# Altium PCB PCB.PcbDoc
Units mm, origin at the board's own origin, x right, y up, seen from the top; angles counter-clockwise.
Board outline 56.9 x 34.04 mm, 2 copper layers (Top Layer, Bottom Layer); 29 components, 22 nets, 101 pads, 21 vias.
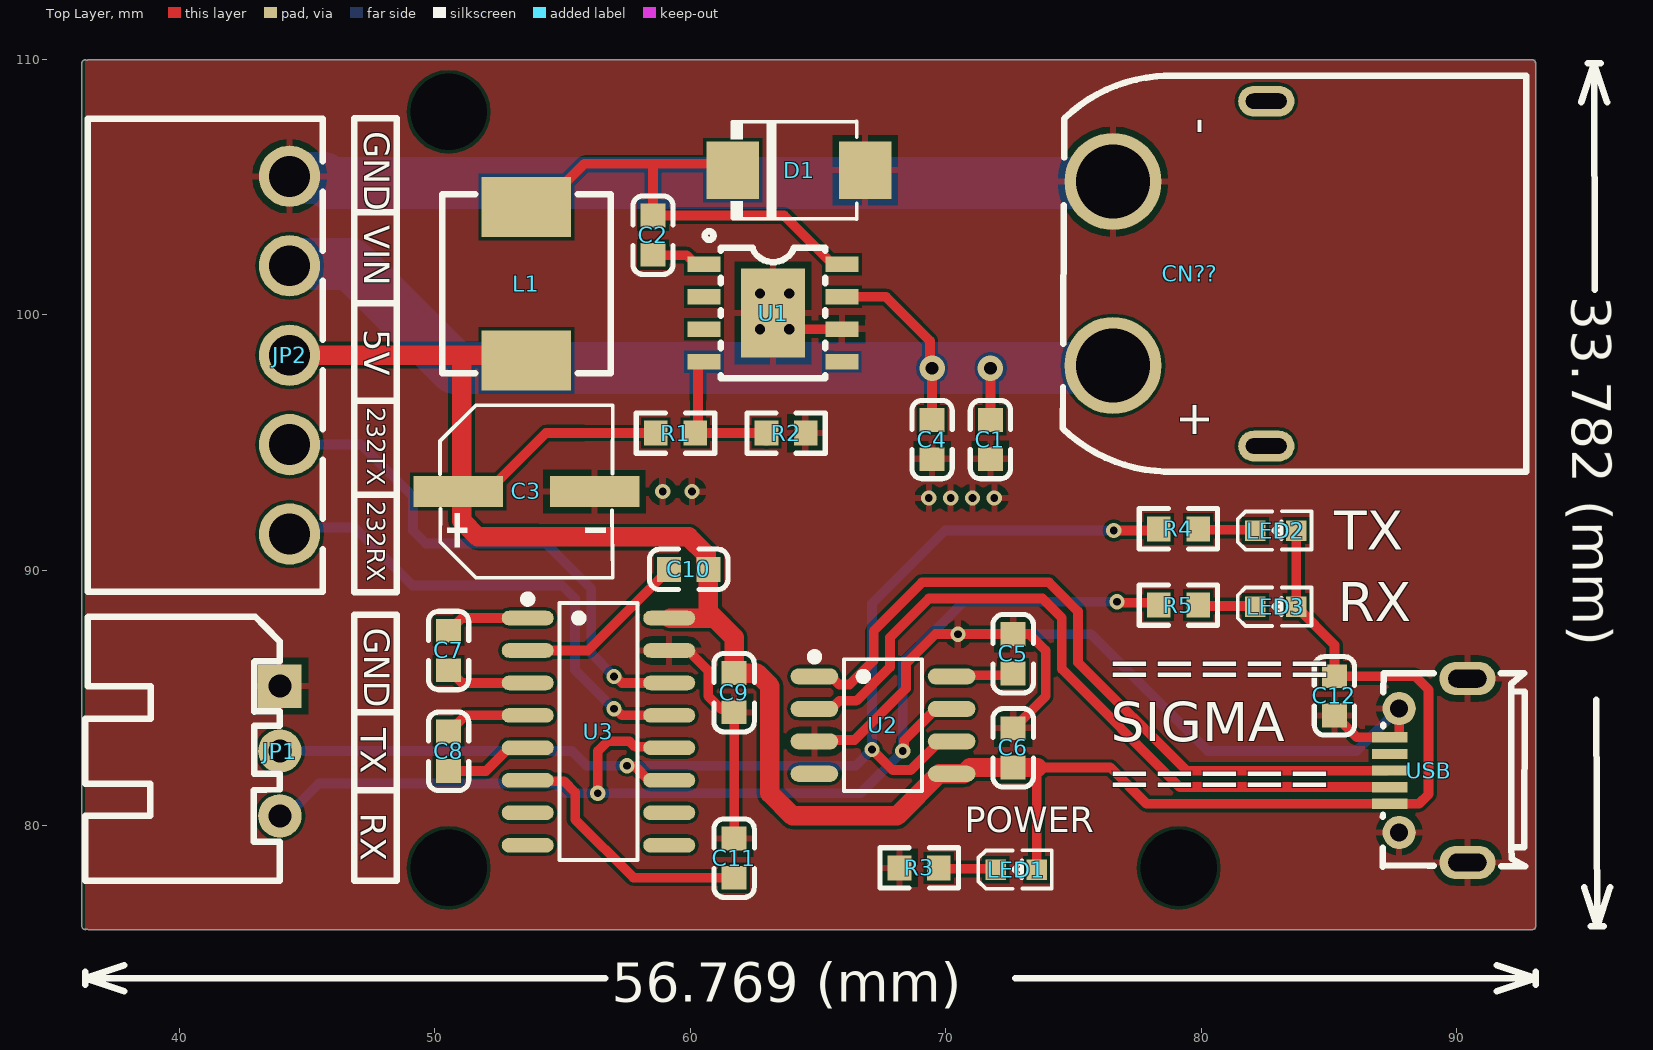
[diagram p0: Top Layer view]
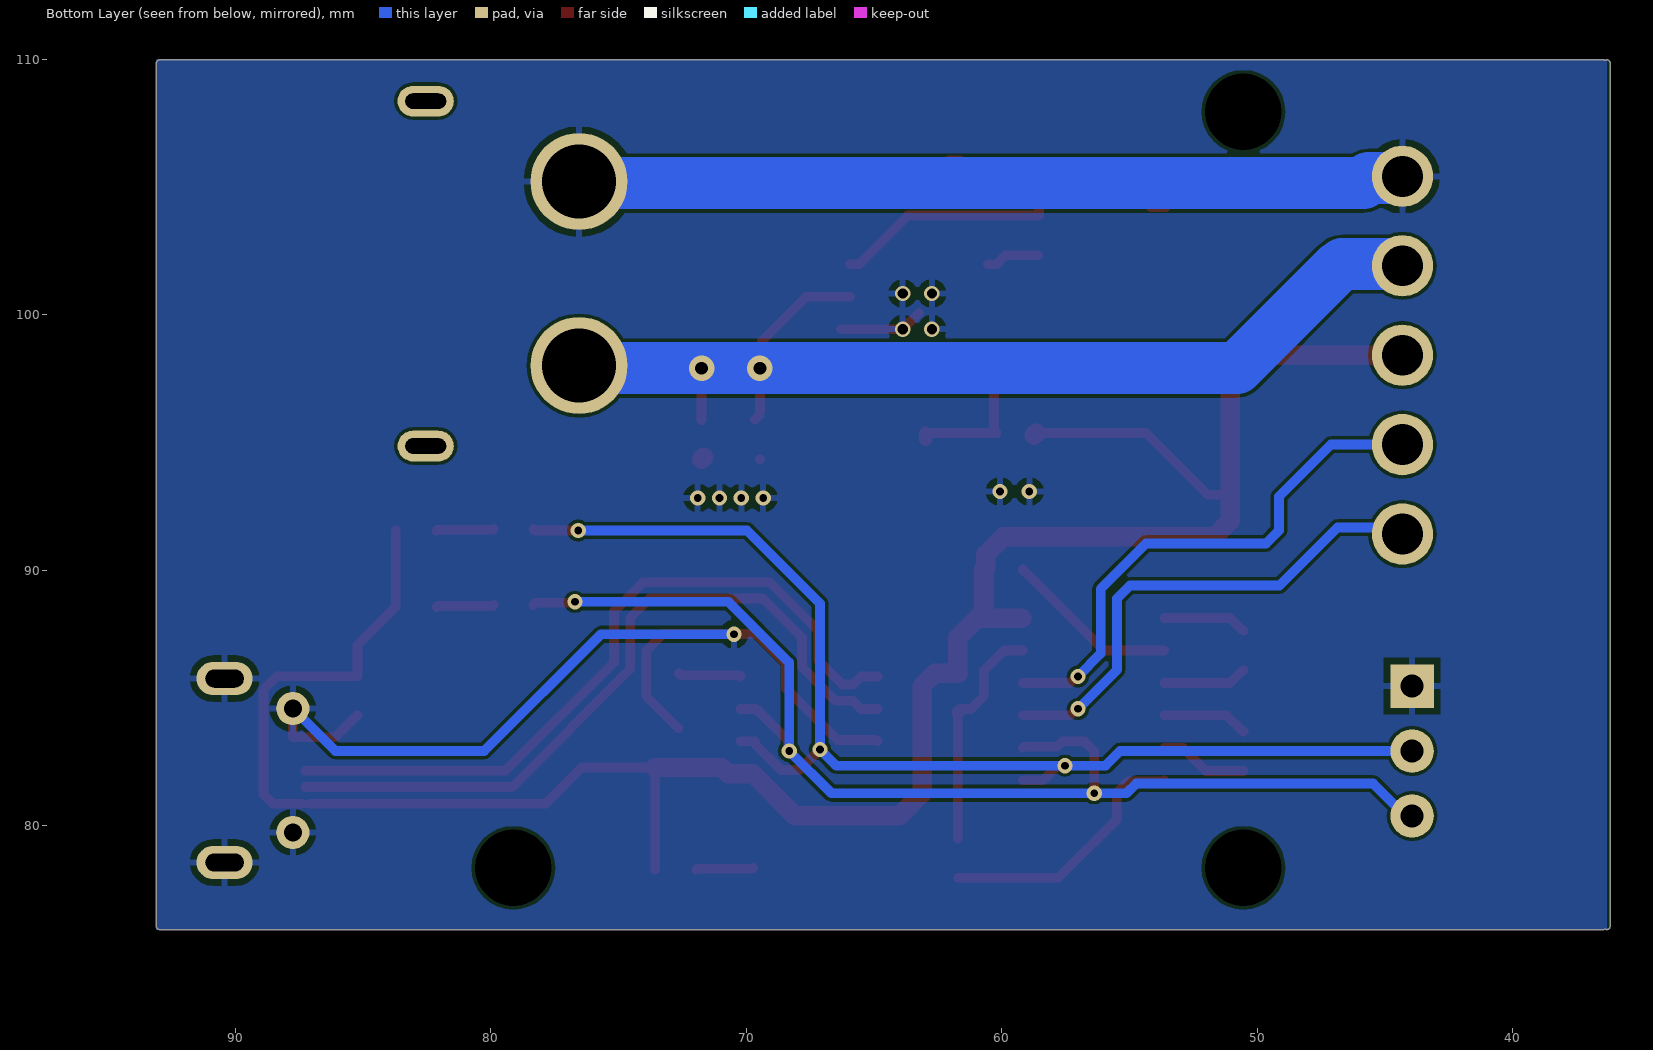
[diagram p1: Bottom Layer view, seen from below]
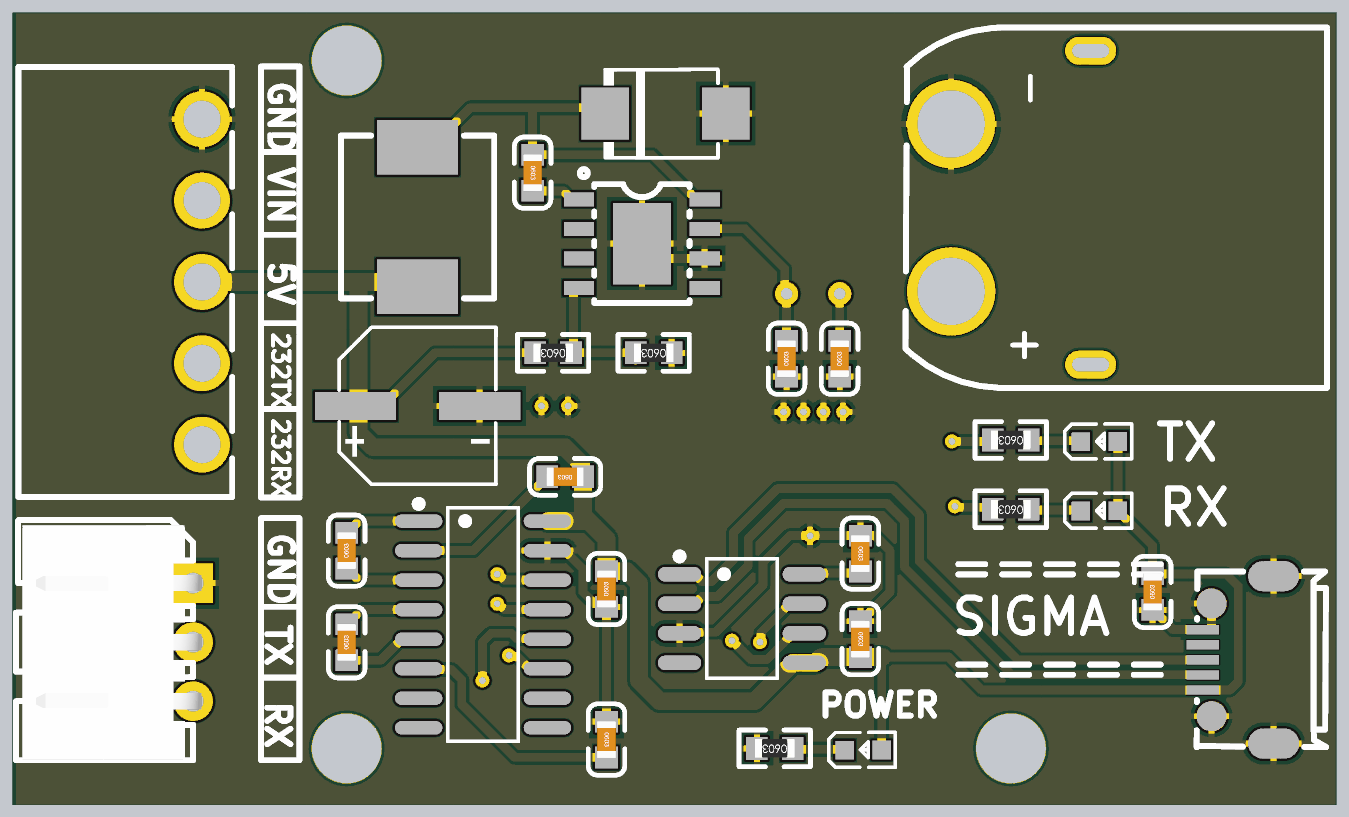
[diagram p2: 3D render of the assembled board from above, using the file's embedded part models]

## Layer stack, top to bottom
Top Solder: solder mask 0.0102, Solder Resist, Dk 3.5
Top Layer: signal copper 0.0356
Dielectric 1: dielectric 0.32, FR-4, Dk 4.8
Bottom Layer: signal copper 0.0356
Bottom Solder: solder mask 0.0102, Solder Resist, Dk 3.5

## Board outline
36.386,75.963 cw(c36.322,76.073) 36.195,76.073 36.195,109.855 cw(c36.322,109.855) 36.386,109.965 cw(c36.449,109.855) 36.449,109.982 92.964,109.982 cw(c92.964,109.855) 93.091,109.855 93.091,76.073 cw(c92.964,76.073) 92.964,75.946 36.449,75.946 cw(c36.449,76.073)

## Design rules (kind name [scope] priority, off if disabled: settings)
Clearance [All] p1: gap=0.127 ignorepadtopadclearanceinfootprint=FALSE
DiffPairsRouting [All] p1: maxlimit=0.254 minlimit=0.254 mostfreqgap=0.254 toplayer_minwidth=0.381 toplayer_maxwidth=0.381 toplayer_prefwidth=0.381 bottomlayer_minwidth=0.381 bottomlayer_maxwidth=0.381 bottomlayer_prefwidth=0.381 maxuncoupledlength=12.7
PolygonConnect [All] p1: connectstyle=Relief reliefconductorwidth=0.254 reliefentries=4 polygonreliefangle="90 Angle" airgapwidth=0.254
RoutingVias [All] p1: holewidth=0.3 width=0.6 viastyle="Through Hole" minholewidth=0.3 minwidth=0.6 maxholewidth=0.711 maxwidth=1.27
SolderMaskExpansion [All] p1: expansion=0.102 istentingtop=FALSE
UnRoutedNet [All] p1: checkbadconnections=TRUE
Width [All] p1: maxlimit=2.54 minlimit=0.254 preferedwidth=0.381 minimp=50.000000 maximp=50.000000 favimp=50.000000
28 further rules are at their usual default settings.

## Classes and differential pairs
differential pair D: +D_P -D_N

## Components (designator, comment, footprint, x,y, rotation, side; value= is the part's Value field where it differs from the comment)
C1 "4.7uF" 0603_C 71.755,95.123 r90 top
C2 "10nF" 0603_C 58.547,103.124 r270 top
C3 "220uF/25V" CAP-SMD_BD6.3-L6.6-W6.6-LS7.4-FD 53.594,93.091 r0 top value=220uF
C4 "4.7uF" 0603_C 69.469,95.123 r90 top
C5 "100nF" 0603_C 72.644,86.741 r270 top
C6 "100nF" 0603_C 72.644,83.058 r270 top
C7 "470nF" 0603_C 50.546,86.868 r90 top
C8 "470nF" 0603_C 50.546,82.923 r90 top
C9 "470nF" 0603_C 61.722,85.217 r90 top
C10 "470nF" 0603_C 59.944,90.043 r180 top
C11 "470nF" 0603_C 61.722,78.74 r270 top
C12 "10uF" 0603_C 85.217,85.09 r90 top
CN?? "XT60PW-M" CONN-TH_XT60PW-M 79.55,101.619 r180 top
D1 "SS54" SMB_L4.3-W3.6-LS5.4-RD 64.262,105.664 r0 top
JP1 "HDR-1X3" XH2.54-WI-3P 43.942,82.931 r270 top
JP2 "KF2EDGR-3.5-5P" CONN-TH_5P-P3.50_KF2EDGR-3.5-5P 44.323,98.425 r270 top
L1 "22uH" IND-SMD_L7.3-W6.8 53.594,101.219 r90 top
LED1 "NCD0603R1_C84263" LED0603-RD 72.763,78.29 r0 top
LED2 "NCD0603R1_C84263" LED0603-RD 82.923,91.559 r0 top
LED3 "NCD0603R1_C84263" LED0603-RD 82.923,88.577 r0 top
R1 "10KΩ (1002) ±1%" 0603_R 59.428,95.377 r180 top
R2 "3.24KΩ ±1%" 0603_R 63.754,95.377 r180 top
R3 "470Ω (4700) ±1%" 0603_R 68.961,78.359 r180 top
R4 "470Ω (4700) ±1%" 0603_R 79.113,91.628 r180 top
R5 "470Ω (4700) ±1%" 0603_R 79.113,88.646 r180 top
U1 "TPS5430DDAR" ESOP-8_L4.9-W3.9-P1.27-LS6.0-TL-EP 63.246,100.076 r0 top
U2 "CH340N" SOP-8_L4.9-W3.9-P1.27-LS6.0-BL 67.549,83.947 r270 top
U3 "MAX232D" SOP-16_L9.9-W3.9-P1.27-LS6.0-BL 56.413,83.693 r270 top
USB "MicroXNJ" MICRO-USB-SMD_MICROXNJ 88.9,82.169 r90 top

## Footprints (in the part's own frame and the unit in brackets; to place one, negate y for a bottom-side part, rotate by r counter-clockwise, add the part's x,y. Pads: shape width x height; smd on the part's side, far side on the other; paste and mask are expansions set on the pad)
0603_C [mm]
  rect 0.93x0.98 smd: 1(-0.77,0) 2(0.77,0)
  silkscreen extent -1.53,-0.79 1.54,0.79, body extent -0.8,-0.41 0.8,0.41, height 0.81
0603_R [mm]
  rect 0.93x0.98 smd: 1(-0.77,0) 2(0.77,0)
  silkscreen extent -1.53,-0.79 1.54,0.79, body extent -0.85,-0.4 0.85,0.4, height 0.56
CAP-SMD_BD6.3-L6.6-W6.6-LS7.4-FD [mm]
  rect 3.5x1.2 smd: 1(-2.67,0) 2(2.67,0)
  silkscreen extent -3.38,-3.38 3.38,3.38
CONN-TH_5P-P3.50_KF2EDGR-3.5-5P [mm]
  round 2.4 hole 1.6: 1(-7,0) 2(-3.5,0) 3(0,0) 4(3.5,0) 5(7,0)
  silkscreen extent -9.25,-7.9 9.25,1.3
CONN-TH_XT60PW-M [mm]
  round 3.8 hole 2.9 paste+0 mask+0.05: 1(3,-3.6) 2(3,3.6)
  oval 2.2x1.2 hole 0.6 slot 1.6 at 0 deg paste+0 mask+0.05: 3(-3,6.75) 4(-3,-6.75)
  silkscreen extent -13.17,-7.75 4.96,7.75
ESOP-8_L4.9-W3.9-P1.27-LS6.0-TL-EP [mm]
  rect 1.3x0.6 smd: 1(-2.7,1.905) 2(-2.7,0.635) 3(-2.7,-0.635) 4(-2.7,-1.905) 5(2.7,-1.905) 6(2.7,-0.635) 7(2.7,0.635) 8(2.7,1.905)
  rect 2.5x3.5 smd: 9(0,0)
  silkscreen extent -2.67,-2.55 2.05,3.2
IND-SMD_L7.3-W6.8 [mm]
  rect 2.35x3.5 smd: 1(-3,0) 2(3,0)
  silkscreen extent -3.5,-3.3 3.5,3.3
LED0603-RD [mm]
  rect 0.8x0.8 smd: 1(-0.799,-0.003) 2(0.799,0.003)
  silkscreen extent -1.49,-0.75 1.39,0.76
MICRO-USB-SMD_MICROXNJ [mm]
  rect 0.4x1.4 smd paste-100 mask+0.051: 1(-1.3,1.521) 2(-0.65,1.521) 3(0,1.521) 4(0.65,1.521) 5(1.3,1.521)
  round 1.3 hole 0.7: 6(2.425,1.149) 9(-2.425,1.149)
  oval 1.3x2.2 hole 0.7 slot 1.5 at 90 deg: 7(3.6,-1.521) 8(-3.6,-1.521)
  silkscreen extent -3.76,-3.78 3.8,1.79
SMB_L4.3-W3.6-LS5.4-RD [mm]
  rect 2.047x2.241 smd: 1(-2.591,0) 2(2.591,0)
  silkscreen extent -2.67,-1.91 2.26,1.91
SOP-8_L4.9-W3.9-P1.27-LS6.0-BL [mm]
  oval 0.63x1.865 smd: 1(-1.905,-2.682) 2(-0.635,-2.682) 3(0.635,-2.682) 4(1.905,-2.682) 5(1.905,2.682) 6(0.635,2.682) 7(-0.635,2.682) 8(-1.905,2.682)
  silkscreen extent -2.82,-2.83 2.58,1.52
SOP-16_L9.9-W3.9-P1.27-LS6.0-BL [mm]
  oval 0.574x2.038 smd: 1(-4.445,-2.769) 2(-3.175,-2.769) 3(-1.905,-2.769) 4(-0.635,-2.769) 5(0.635,-2.769) 6(1.905,-2.769) 7(3.175,-2.769) 8(4.445,-2.769) 9(4.445,2.769) 10(3.175,2.769) 11(1.905,2.769) 12(0.635,2.769) 13(-0.635,2.769) 14(-1.905,2.769) 15(-3.175,2.769) 16(-4.445,2.769)
  silkscreen extent -5.33,-2.92 5.03,1.52
XH2.54-WI-3P [mm] "接插件，3P"
  rect 1.7x1.7 hole 0.9: 1(-2.54,0)
  round 1.7 hole 0.9: 2(0,0) 3(2.54,0)
  silkscreen extent -5.26,-7.62 5.08,0, body extent -5.04,-7.35 5.04,0.35, height 5.73

## Part data
C1 C4: library part "0603 4.7uF (475) 10% 16V", "贴片电容", Package=0603, SuppliersPartNumber=C19666, ComponentLink1Description=供应商链接, ComponentLink1URL=http://www.szlcsc.com/product/details_20375.html, Supplier=LC
C2: library part "0603 10nF (103) 10% 50V", "贴片电容", Package=0603, SuppliersPartNumber=C57112, ComponentLink1Description=供应商链接, ComponentLink1URL=http://www.szlcsc.com/product/details_58143.html, Supplier=LC
C3: library part RVT1E221M0607, Equivalent Series Resistance(ESR)=-, JLCPCB Part Class="Extended Part", LCSC Part Name="220uF ±20% 25V", Manufacturer=ROQANG(容强), Operating Temperature=-40℃~+105℃, Rated Voltage=25V, Ripple Current=150mA@120Hz, Tolerance=±20%, Add into BOM=yes, Convert to PCB=yes, Datasheet=https://atta.szlcsc.com/upload/public/pdf/source/20211118/497C0614266278696CA52BDF245B991F.pdf, Device=RVT1E221M0607, L=7.7mm, Lifetime @ Temp=-, Manufacturer Part=RVT1E221M0607, Name=220uF, Supplier=LCSC, Supplier Footprint=SMD,D6.3xL7.7mm, Supplier Part=C2918361, Symbol=RVT1E221M0607_C2918361, φD=6.3mm
C5 C6: library part "0603 100nF (104) 10% 50V", "贴片电容", Package=0603, SuppliersPartNumber=C14663, ComponentLink1Description=供应商链接, ComponentLink1URL=http://www.szlcsc.com/product/details_15331.html, Supplier=LC
C7 C8 C9 C10 C11: library part "0603 470nF (474) 10% 25V", "贴片电容", Package=0603, SuppliersPartNumber=C1623, ComponentLink1Description=供应商链接, ComponentLink1URL=http://www.szlcsc.com/product/details_1975.html, Supplier=LC
C12: library part "0603 10uF (106) 10% 10V", "贴片电容", Package=0603, SuppliersPartNumber=C19702, ComponentLink1Description=供应商链接, ComponentLink1URL=http://www.szlcsc.com/product/details_20411.html, Supplier=LC
CN??: JLCPCB Part Class="Extended Part", LCSC Part Name="AMASS(艾迈斯)航模插头xt90连接器150公母对接pw锂电池公头 板插卧式XT60PW-M", Manufacturer=AMASS(艾迈斯), Add into BOM=yes, Convert to PCB=yes, Datasheet=https://atta.szlcsc.com/upload/public/pdf/source/20180125/C98732_15168617837851301983.pdf, Device=XT60PW-M, Manufacturer Part=XT60PW-M, Name=XT60PW-M, Supplier=LCSC, Supplier Footprint=-, Supplier Part=C98732, Symbol=XT60PW-M
D1: library part SS54_C2988643, Average Rectified Current (Io)=5A, Forward Voltage (Vf@If)=600mV@5A, JLCPCB Part Class="Extended Part", LCSC Part Name="40V 5A 600mV@5A", Manufacturer=UMW(广东友台半导体), Reverse Leakage Current (Ir)=1mA@40V, Reverse Voltage (Vr)=40V, Add into BOM=yes, Convert to PCB=yes, Datasheet=https://atta.szlcsc.com/upload/public/pdf/source/20220412/DFE4B5D1FBAE230579785280D401C062.pdf, Device=SS54_C2988643, Manufacturer Part=SS54, Name=SS54, Supplier=LCSC, Supplier Footprint=SMB, Supplier Part=C2988643, Symbol=SS54_C2988643
JP1: library part "Header 3 Pitch2.54", "3P接插件", BOM名称=3P接插件, 学习资源=www.ooocke.com, 版权归属=源创客
JP2: Color=绿色, Current Rating (Max)=8A, JLCPCB Part Class="Extended Part", LCSC Part Name="板端/插座-闭口 3.5mm 排数:1 每排P数:5 弯针", Manufacturer=KEFA(科发), Operating Temperature Range=-40℃~+105℃, Voltage Rating (Max)=300V, Add into BOM=yes, Connector Type=板端/插座-闭口, Convert to PCB=yes, Datasheet=https://atta.szlcsc.com/upload/public/pdf/source/20191023/C441174_3952556C0659C22A17E7C4561A2B2291.pdf, Device=KF2EDGR-3.5-5P, Manufacturer Part=KF2EDGR-3.5-5P, Mounting Style=弯针, Name=KF2EDGR-3.5-5P, Number of PINs Per Row=5, Number of Rows=1, Pitch=3.5mm, Supplier=LCSC, Supplier Footprint=P=3.5mm, Supplier Part=C441174, Symbol=KF2EDGR-3.5-5P, Wire Gauge - AWG=-, Wire Gauge - mm?=-
L1: library part MWSA0603S-220MT, DC Resistance (DCR)=170mΩ, JLCPCB Part Class="Extended Part", LCSC Part Name="22uH ±20%", Manufacturer=Sunlord(顺络), Rated Current=2.5A, Tolerance=±20%, Add into BOM=yes, Convert to PCB=yes, Datasheet=https://atta.szlcsc.com/upload/public/pdf/source/20190729/C408453_64865E9628338F56CB759A725C0B9F8F.pdf, Device=MWSA0603S-220MT, Height=3mm, Length=6.6mm, Manufacturer Part=MWSA0603S-220MT, Name=22uH, Supplier=LCSC, Supplier Footprint=SMD, Supplier Part=C408453, Symbol=MWSA0603S-220MT, Width=7mm
LED1 LED2 LED3: library part "0603 LED-RD", Emitted Color=红灯, JLCPCB Part Class="Extended Part", Manufacturer=国星光电, Manufacturer Part=NCD0603R1, Add into BOM=yes, Convert to PCB=yes, Datasheet=https://atta.szlcsc.com/upload/public/pdf/source/20200820/C84263_DABC6A75E58F576973B407FDBA283D60.pdf, Device=NCD0603R1_C84263, LCSC Part Name=红灯, Name=NCD0603R1, Supplier=LCSC, Supplier Footprint=0603, Supplier Part=C84263, Symbol=FC-DA1608HRK-620D
R1: library part "0603 10KΩ (1002) 1%", "贴片电阻", Package=0603, SuppliersPartNumber=C25804, ComponentLink1Description=供应商链接, ComponentLink1URL=http://www.szlcsc.com/product/details_26547.html, Supplier=LC
R2: library part "0603 1KΩ (1001) 1%", "贴片电阻", Package=0603, SuppliersPartNumber=C21190, ComponentLink1Description=供应商链接, ComponentLink1URL=http://www.szlcsc.com/product/details_21904.html, Supplier=LC
R3 R4 R5: library part "0603 470Ω (4700) 1%", "贴片电阻", Package=0603, SuppliersPartNumber=C23179, ComponentLink1Description=供应商链接, ComponentLink1URL=http://www.szlcsc.com/product/details_23906.html, Supplier=LC
U1: Input Voltage=-, JLCPCB Part Class="Basic Part", LCSC Part Name=降压型, Manufacturer=TI(德州仪器), Add into BOM=yes, Convert to PCB=yes, Datasheet=https://atta.szlcsc.com/upload/public/pdf/source/20161207/1481104217724.pdf, Device=TPS5430DDAR, Function=降压型, Manufacturer Part=TPS5430DDAR, Name=TPS5430DDAR, Number of Outputs=-, Output Current (Max)=-, Supplier=LCSC, Supplier Footprint=SO-8, Supplier Part=C9864, Switching Frequency=-, Symbol=TPS5430DDAR, Synchronous Rectification=-, Topology=-
U2: library part CH340N_C2977777, Designer=U?, Device=CH340N_C2977777, Symbol=CH340N_C2977777
U3: library part MAX232D_C5342103, JLCPCB Part Class="Extended Part", LCSC Part Name=RS232芯片, Manufacturer=Tokmas(托克马斯), Add into BOM=yes, Convert to PCB=yes, Datasheet=https://atta.szlcsc.com/upload/public/pdf/source/20221230/256C03E6A712651C05B16D4BCED108A3.pdf, Device=MAX232D_C5342103, Manufacturer Part=MAX232D, Name=MAX232D, Supplier=LCSC, Supplier Footprint=SOP-16, Supplier Part=C5342103, Symbol=MAX232D_C5342103
USB: Current Rating - Power (Max)=1A, JLCPCB Part Class="Extended Part", LCSC Part Name="Micro-B 母座 卧贴 小牛角有柱 卷边 编带", Manufacturer="SHOU HAN(首韩)", Operating Temperature Range=-20℃~+85℃, Add into BOM=yes, Connector Type=Micro-B, Convert to PCB=yes, Datasheet=https://atta.szlcsc.com/upload/public/pdf/source/20220415/2494EDFF499AF6F852F7C820374B6AF3.pdf, Device=MicroXNJ, Gender=母座, Manufacturer Part=MicroXNJ, Mounting Style=卧贴, Name=MicroXNJ, Number of Contacts=5P, Number of Ports=1, Standard="USB 2.0", Supplier=LCSC, Supplier Footprint=SMD, Supplier Part=C404969, Symbol=MICROXNJ

## Free pads (board coordinates)
  round 1.524 hole 3: 2(79.121,78.359) 3(50.546,78.359) 5(50.546,107.95)

## Via types
v1: diameter 0.6, hole 0.3, Top Layer to Bottom Layer, 15 vias
v2: diameter 0.6, hole 0.4, Top Layer to Bottom Layer, 4 vias
v3: diameter 1, hole 0.5, Top Layer to Bottom Layer, 2 vias

## Nets (pads, with @x,y where several pads share a name; then routed paths per layer and width w, separated by ;. In a path a pad name is that pad's centre, name@x,y a point inside that pad or via, vN(x,y) a via of type N, cw(c..) or ccw(c..) an arc to the next point about the centre after c; other vN are vias at no path point)
232RX: JP2.5 U3.13 | length 19.6
  Top Layer w0.381: v1(57.023,84.582) 57.082,84.582 57.336,84.328 U3.13
  Bottom Layer w0.381: JP2.5 44.577,91.679 46.863,91.679 49.134,89.408 54.986,89.408 55.494,88.9 55.494,86.111 v1(57.023,84.582)
232TX: JP2.4 U3.14 | length 21
  Top Layer w0.381: v1(57.023,85.852) 57.082,85.852 57.336,85.598 U3.14
  Bottom Layer w0.381: JP2.4 47.117,94.925 49.149,92.893 49.149,91.567 49.657,91.059 54.356,91.059 56.134,89.281 56.134,86.741 v1(57.023,85.852)
+5: C3.1 C6.2 C9.2 C10.1 C12.2 JP2.3 L1.1 LED1.2 LED2.2 LED3.2 R1.2 U2.5 U3.16 USB.1 | length 93.5
  Top Layer w0.381: C3.1@51.054,92.964 51.947,92.964 54.36,95.377 R1.2 ; 51.054,95.186 51.244,95.377 ; U3.16 59.212,88.138 U3.16@59.301,88.227 ; LED1.2 73.562,82.258 73.592,82.288 76.446,82.288 77.865,80.869 USB.1@87.125,80.869 ; LED2.2 LED3.2 85.217,87.086 C12.2 88.375,85.86 88.9,85.335 88.9,81.239 88.53,80.869 USB.1
  Top Layer w0.762: JP2.3 51.054,98.425 ; L1.1 53.388,98.425 51.054,98.425 ; R1.2 R1.2@58.742,95.293 ; U3.16@59.212,88.138 60.96,88.138 ; C9.2@61.705,85.979 62.611,85.979 63.119,85.471 63.119,81.28 64.008,80.391 68.095,80.391 69.746,82.042 U2.5 70.716,82.042 70.962,82.288 C6.2 73.592,82.288 ; C9.2 61.722,87.376 60.96,88.138 ; 51.054,98.425 51.054,95.186 51.054,92.964 51.054,91.948 51.689,91.313 59.944,91.313 60.63,90.627 60.63,90.127 C10.1 60.714,88.384 60.96,88.138
D_N: U2.2 USB.2 | length 29.1
  Top Layer w0.381: U2.2 65.514,84.582 65.831,84.9 66.503,84.9 67.818,86.214 67.818,87.376 69.342,88.9 73.787,88.9 74.549,88.138 74.549,86.136 79.158,81.526 USB.2@87.262,81.526
D_P: U2.1 USB.3 | length 29.1
  Top Layer w0.381: U2.1 65.514,85.852 65.831,85.534 66.24,85.534 67.183,86.477 67.183,87.639 69.079,89.535 74.05,89.535 75.184,88.401 75.184,86.399 79.421,82.161 USB.3@87.262,82.161
GND: C1.1 C3.2 C4.1 C5.1 C6.1 C9.1 C11.1 C12.1 CN??.1 D1.2 JP1.1 JP2.1 R2.1 R3.2 U1.6 U1.9 U2.3 U3.15 USB.5 USB.6 USB.7 USB.8 USB.9 | length 85.7
  Top Layer w0.381: U3.15 59.914,86.868 60.706,86.076 60.706,85.09 61.214,84.582 61.587,84.582 C9.1@61.642,84.527 ; C11.1 C9.1 ; U1.9 v2(63.881,99.441) U1.6 U1.6@66.296,99.441 ; U2.3 64.914,83.36 66.432,83.36 68.453,85.381 68.453,86.36 69.604,87.511 C5.1 73.271,87.511 73.914,86.868 73.914,85.073 72.669,83.828 C6.1 ; C4.1@69.465,94.357 C4.1 ; C1.1 C1.1@71.759,94.349 ; C12.1 85.242,84.32 86.093,83.469 USB.5 87.742,83.469 87.751,83.478 USB.6
  Top Layer w0.508: C9.1@61.642,84.527 C9.1 ; C1.1@71.595,94.361 C1.1@71.671,94.437
  Top Layer w0.762: C1.1@71.671,94.437 C1.1
  Bottom Layer w0.381: v1(70.485,87.503) 75.692,87.503 80.264,82.931 86.088,82.931 USB.6 ; USB.7@90.245,85.593 USB.7 ; USB.8@90.246,78.745 USB.8
  Bottom Layer w2.032: JP2.1@44.394,105.496 JP2.1 44.393,105.355 45.648,105.355 45.846,105.157 76.713,105.157 CN??.1@76.756,105.2 ; CN??.1@76.456,105.339 CN??.1@77.271,105.609
  other v1: 69.342,92.837 70.196,92.837 71.05,92.837 71.904,92.837 58.928,93.091 60.071,93.091
  other v2: 62.738,99.441 62.738,100.838 63.881,100.838
NetC2_1: C2.1 D1.1 L1.2 U1.8 | length 19.5
  Top Layer w0.381: L1.2 54.169,104.219 55.868,105.918 58.547,105.918 ; D1.1@61.671,105.567 D1.1 ; D1.1@61.671,105.918 58.547,105.918 ; U1.8 65.596,101.981 63.683,103.894 C2.1 58.547,105.918
  Top Layer w0.635: D1.1@61.671,105.918 D1.1@62.035,105.918
NetC2_2: C2.2 U1.1 | length 2.1
  Top Layer w0.381: C2.2@58.584,102.342 59.863,102.342 60.086,102.118 60.086,102.09 60.196,101.981 U1.1
NetC5_2: C5.2 U2.8 | length 2.5
  Top Layer w0.381: U2.8 70.279,85.9 72.573,85.9 C5.2
NetC7_1: C7.1 U3.3 | length 3.3
  Top Layer w0.381: C7.1 50.571,86.098 51.071,85.598 U3.3
NetC7_2: C7.2 U3.1 | length 3.4
  Top Layer w0.381: C7.2@50.628,87.72 C7.2 50.571,87.638 51.071,88.138 U3.1
NetC8_1: C8.1 U3.5 | length 3.5
  Top Layer w0.381: C8.1 52.007,82.153 52.912,83.058 U3.5
NetC8_2: C8.2 U3.4 | length 3.4
  Top Layer w0.381: C8.2 50.571,83.693 51.206,84.328 U3.4
NetC10_2: C10.2 U3.2 | length 6.9
  Top Layer w0.381: U3.2 55.999,86.868 58.874,89.743 58.899,89.743 59.174,90.018 C10.2
NetC11_2: C11.2 U3.6 | length 10.3
  Top Layer w0.381: U3.6 53.681,81.751 55.059,81.751 55.499,81.311 55.499,80.256 57.777,77.978 61.714,77.978 C11.2
NetLED1_1: LED1.1 R3.1 | length 2.3
  Top Layer w0.381: R3.1 69.767,78.323 71.927,78.323 LED1.1
NetLED2_1: LED2.1 R4.1 | length 2.3
  Top Layer w0.381: R4.1 79.919,91.592 82.087,91.592 LED2.1
NetLED3_1: LED3.1 R5.1 | length 2.3
  Top Layer w0.381: R5.1 79.919,88.61 82.087,88.61 LED3.1
NetR1_1: R1.1 R2.2 U1.4 | length 6.1
  Top Layer w0.381: U1.4 60.307,98.171 60.307,95.486 R1.1 R2.2
  Top Layer w0.508: R2.2@62.984,95.131 R2.2
RX: JP1.3 R5.2 U2.7 U3.12 | length 47.5
  Top Layer w0.381: v1(56.388,81.28) 56.388,82.931 56.769,83.312 57.631,83.312 57.848,83.095 59.145,83.095 U3.12 ; v1(68.326,82.931) 68.368,82.973 68.368,83.336 69.614,84.582 U2.7 ; v1(76.708,88.773) 76.75,88.731 78.258,88.731 R5.2
  Bottom Layer w0.381: JP1.3@44.196,80.391 45.466,81.661 54.737,81.661 55.118,81.28 v1(56.388,81.28) 66.675,81.28 v1(68.326,82.931) 68.326,86.397 70.702,88.773 v1(76.708,88.773)
TX: JP1.2 R4.2 U2.6 U3.11 | length 47.4
  Top Layer w0.381: v1(57.531,82.359) 57.573,82.318 57.868,82.318 58.398,81.788 U3.11 ; v1(67.12,82.995) 67.927,82.187 68.634,82.187 69.681,83.233 69.681,83.312 U2.6 ; v1(76.581,91.567) 78.282,91.567 R4.2
  Bottom Layer w0.381: JP1.2@44.196,82.931 55.372,82.931 55.944,82.359 v1(57.531,82.359) 66.484,82.359 v1(67.12,82.995) 67.12,88.709 69.977,91.567 v1(76.581,91.567)
VIN: C1.2 C4.2 CN??.2 JP2.2 U1.7 | length 43.6
  Top Layer w0.381: U1.7 67.666,100.711 69.388,98.989 69.388,97.998 v3(69.469,97.917) 69.469,96.203 C4.2@69.501,96.171 ; C4.2@69.501,96.068 C4.2@69.659,95.909 ; v3(71.755,97.917) C1.2 C1.2@71.787,95.925
  Bottom Layer w2.032: JP2.2 44.393,101.996 46.679,101.996 ; 46.863,101.854 50.8,97.917 v3(69.469,97.917) v3(71.755,97.917) 76.581,97.917 CN??.2@77.006,97.492
pads on no net: CN??.3 CN??.4 U1.2 U1.3 U1.5 U2.4 U3.7 U3.8 U3.9 U3.10 USB.4

## Polygon pours and split planes (outlines as drawn)
GND on Top Layer "Top Layer-GND" (solid, remove dead copper, pour order 6): 54.102,94.107 54.102,91.821 73.406,91.821 73.406,95.123 67.437,95.123 66.04,96.52 64.008,96.52 64.008,94.615 63.246,94.107
GND on Top Layer "Top Layer-No Net" (solid, remove dead copper, pour order 4): 36.322,109.982 93.091,109.982 93.091,75.946 36.322,75.946
GND on Top Layer "Top Layer-No Net 1" (solid, pour order 0): 55.88,96.647 65.405,96.647 65.405,98.552 66.675,99.822 71.755,99.822 71.755,94.488 65.278,94.488 65.278,93.98 64.262,92.964 57.277,92.964 55.88,94.361
GND on Bottom Layer "Bottom Layer-No Net" (solid, remove dead copper, pour order 2): 36.322,109.982 93.091,109.982 93.091,75.946 36.322,75.946

## Silkscreen, mask and mechanical layers (free items; w line width, h text height)
Top Overlay:
  lines w0.254: 36.322,73.787 36.322,74.295 ; 37.846,73.533 36.322,74.041 ; 37.846,74.549 36.322,74.041 ; 46.863,81.407 48.387,81.407 ; 46.863,84.455 48.514,84.455 ; 46.863,92.964 48.514,92.964 ; 46.863,96.647 48.514,96.647 ; 46.863,100.457 48.514,100.457 ; 46.863,104.013 48.514,104.013 ; 56.683,74.041 36.322,74.041 ; 72.73,74.041 93.091,74.041 ; 91.567,73.533 93.091,74.041 ; 91.567,74.549 93.091,74.041 ; 93.091,73.787 93.091,74.295 ; 94.875,108.329 95.377,109.855 ; 94.99,77.595 95.504,76.073 ; 95.123,109.854 95.631,109.856 ; 95.25,76.072 95.758,76.074 ; 95.41,100.988 95.377,109.855 ; 95.471,84.94 95.504,76.073 ; 95.891,108.333 95.377,109.855 ; 96.006,77.599 95.504,76.073 ; 46.863,77.851 46.863,88.265 48.514,88.265 48.514,77.851 46.863,77.851 ; 46.863,89.154 46.863,96.139 46.863,107.696 48.514,107.696 48.514,96.139 48.514,89.154 46.863,89.154
  text "GND" at 47.244,107.188 h1 r270
  text "VIN" at 47.244,103.505 h1 r270
  text "33.782 (mm)" at 94.497,100.73 h1.52 r270.22
  text "5V" at 47.244,99.441 h1 r270
  text "232TX" at 47.371,96.393 h0.7 r270
  text "232RX" at 47.371,92.71 h0.7 r270
  text "TX" at 85.217,90.805 h1.52
  text "RX" at 85.344,88.011 h1.52
  text "GND" at 47.244,87.757 h1 r270
  text "=====" at 76.327,85.471 h1.52
  text "TX" at 47.117,83.82 h1 r270
  text "SIGMA" at 76.454,83.312 h1.52
  text "=====" at 76.327,81.153 h1.52
  text "RX" at 47.117,80.518 h1 r270
  text "POWER" at 70.739,79.756 h1
  text "56.769 (mm)" at 56.937,73.127 h1.52
Mechanical 1:
  lines w0.254: 36.322,76.073 36.322,109.855 ; 36.449,76.073 92.964,76.073 92.964,109.855 38.735,109.855 36.449,109.855

## Text inside footprints (layer, text, board x,y; h text height)
CN??: Top Overlay "-" at 79.44,107.715 h1.33 r270; Top Overlay "+" at 79.186,96.666 h1.33 r270